# Altium PCB ignition.PcbDoc
Units mil, origin at the board's own origin, x right, y up, seen from the top; angles counter-clockwise.
Board outline 2165.35 x 2362.2 mil, 2 copper layers (Top, Bottom); 26 components, 21 nets, 119 pads, 73 vias.
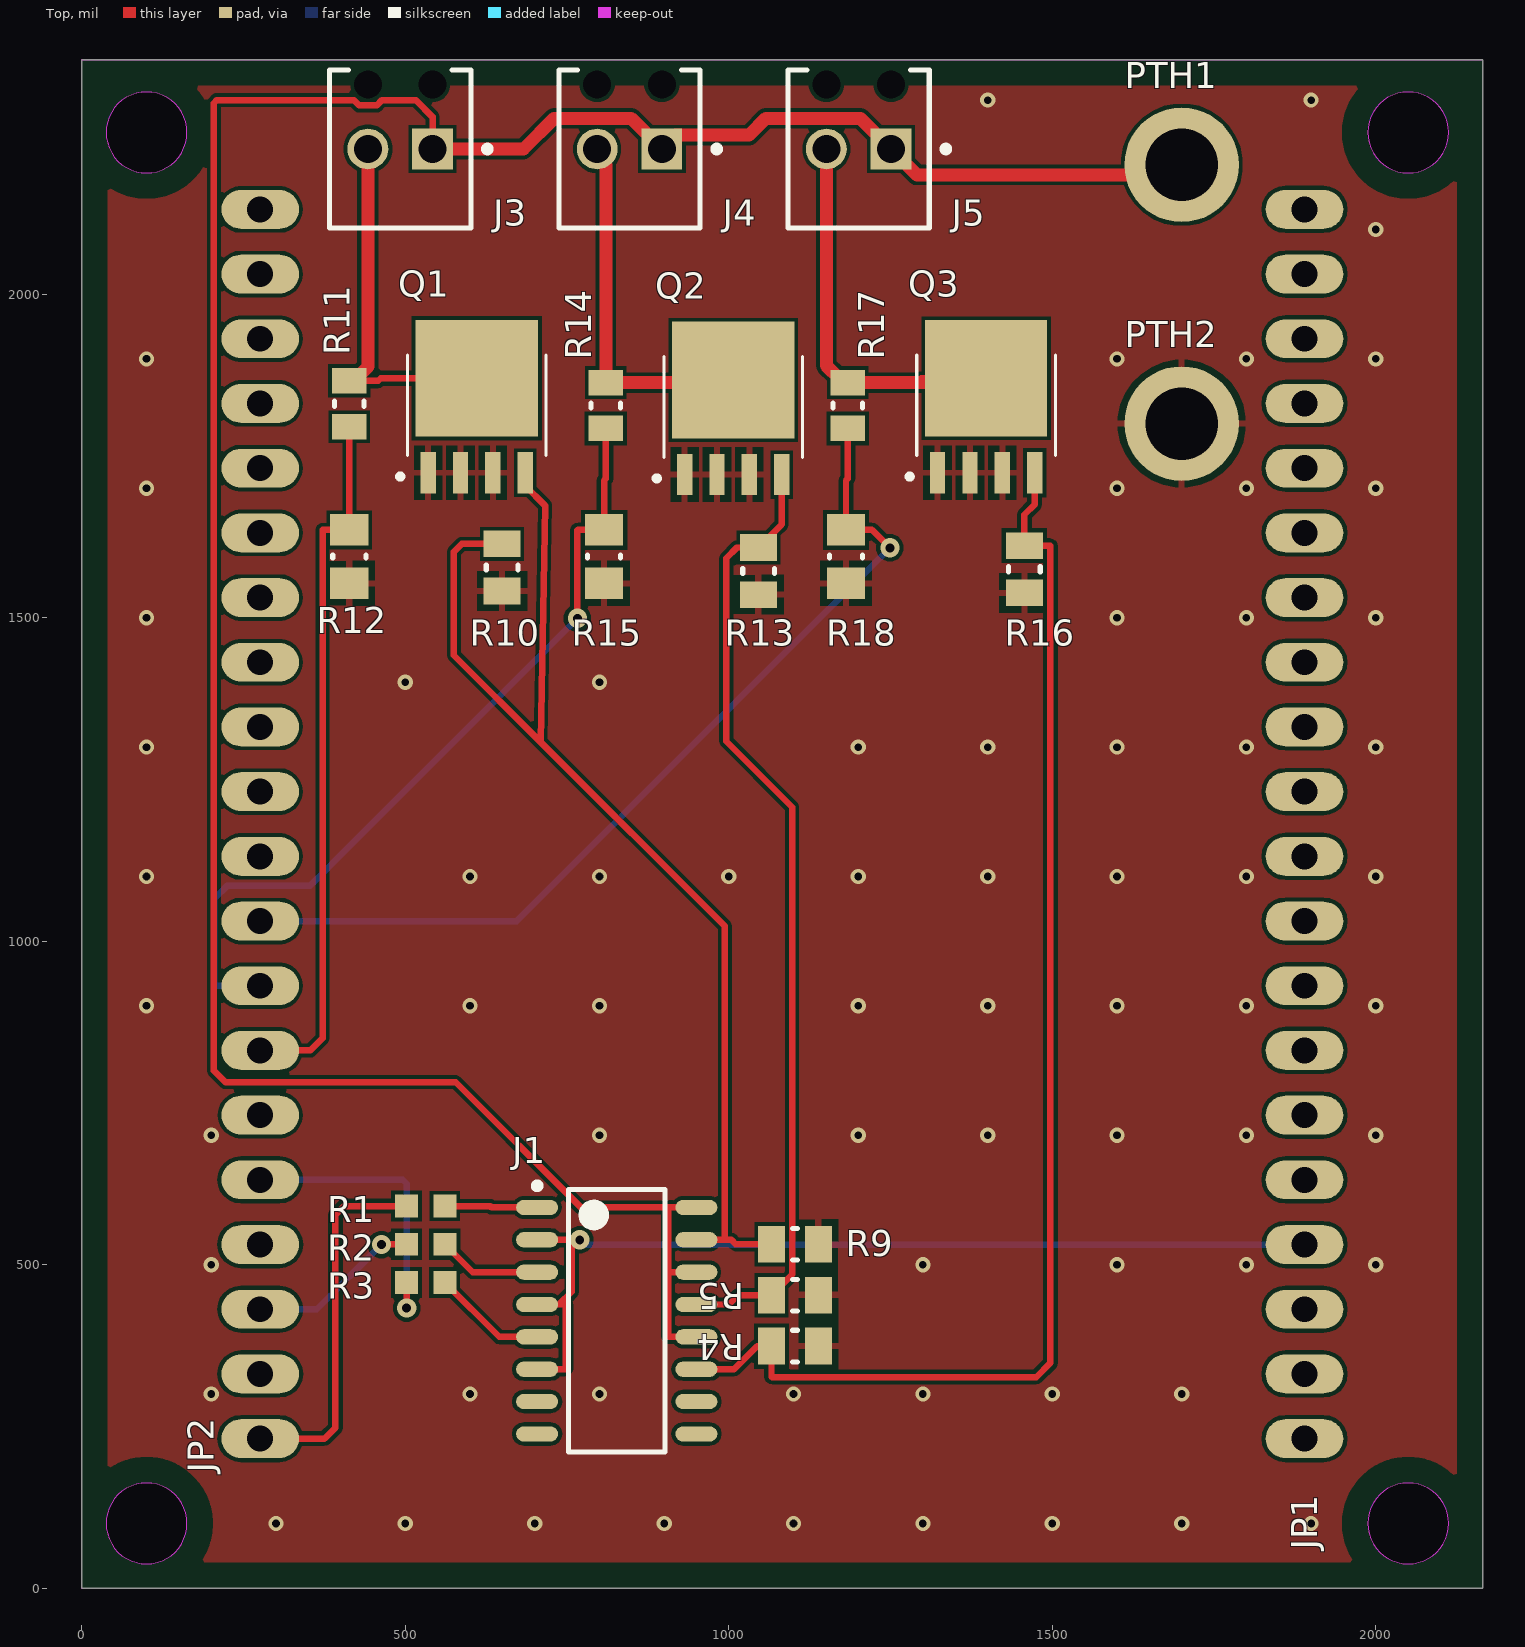
[diagram p0: Top view]
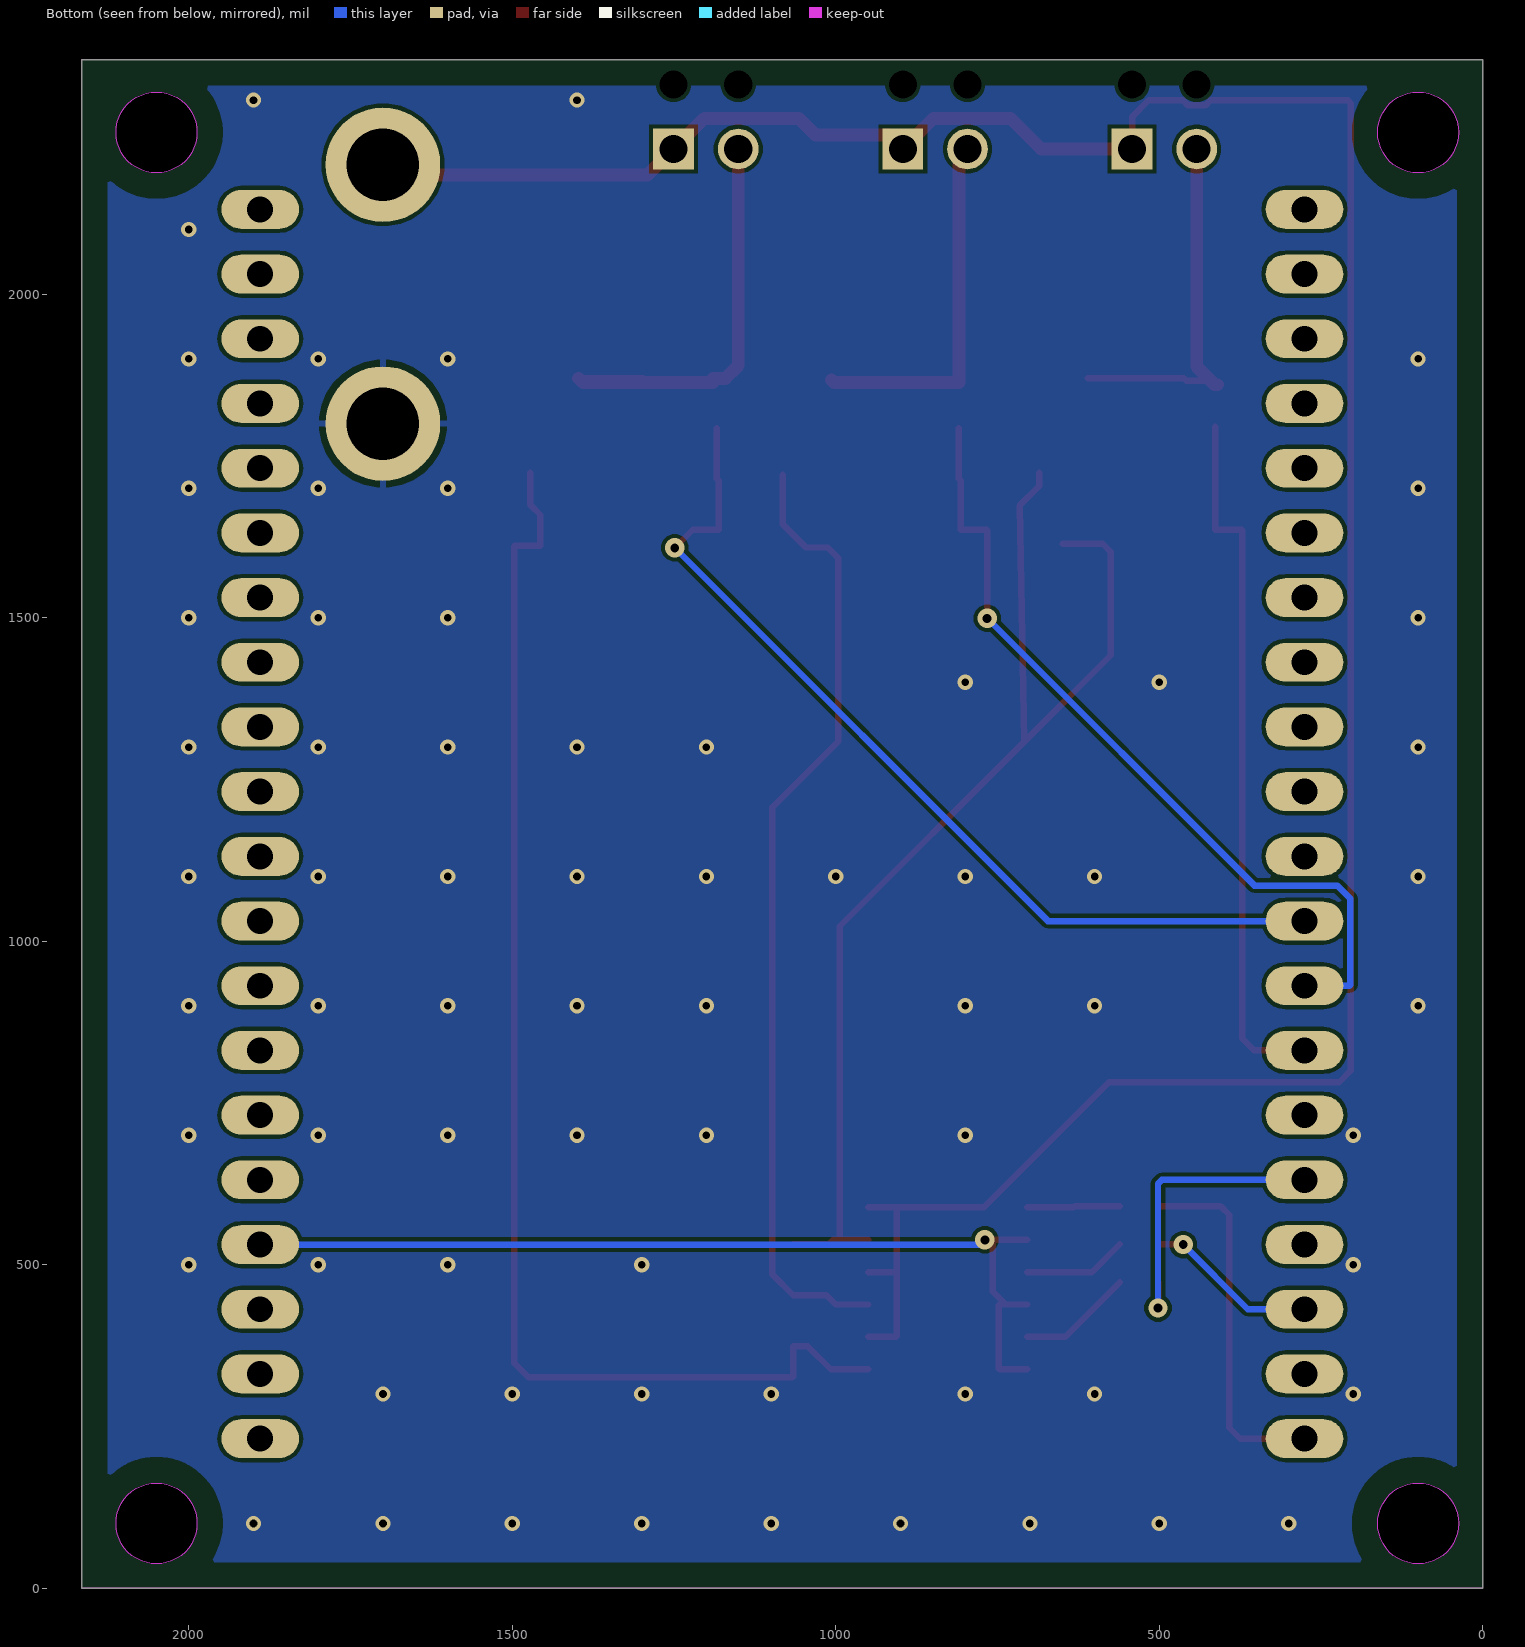
[diagram p1: Bottom view, seen from below]

## Layer stack, top to bottom
Top Solder: solder mask 0.4, Solder Resist, Dk 3.5
Top: signal copper 1.378
Dielectric 1: dielectric 12.6, FR-4, Dk 4.8
Bottom: signal copper 1.378
Bottom Solder: solder mask 0.4, Solder Resist, Dk 3.5

## Board outline
0,2362.2 0,0 2165.35,0 2165.35,2362.2
cut-out: 2050,2187.5 ccw(c2050,2250) 2112.5,2250 ccw(c2050,2250) 2050,2312.5 ccw(c2050,2250) 1987.5,2250 ccw(c2050,2250)
cut-out: 100,2187.5 ccw(c100,2250) 162.5,2250 ccw(c100,2250) 100,2312.5 ccw(c100,2250) 37.5,2250 ccw(c100,2250)
cut-out: 100,37.5 ccw(c100,100) 162.5,100 ccw(c100,100) 100,162.5 ccw(c100,100) 37.5,100 ccw(c100,100)
cut-out: 2050,37.5 ccw(c2050,100) 2112.5,100 ccw(c2050,100) 2050,162.5 ccw(c2050,100) 1987.5,100 ccw(c2050,100)

## Design rules (kind name [scope] priority, off if disabled: settings)
BoardOutlineClearance mdCopperDimension [All] p1: gap=10 ignorepadtopadclearanceinfootprint=FALSE except(0: Arc-SplitContinuation Track-SplitContinuation SMDPad-SplitContinuation THPad-SplitContinuation Via-SplitContinuation Fill-SplitContinuation Poly-SplitContinuation Region-SplitContinuation Text-SplitContinuation; 40: Poly-OutlineEdge Poly-CavityEdge Poly-CutoutEdge Poly-SplitBarrior)
Clearance "Clearance (Same Net)" [All] p1: gap=6 ignorepadtopadclearanceinfootprint=FALSE
Clearance [All] p2: gap=6 ignorepadtopadclearanceinfootprint=FALSE
HoleSize [All] p1: absolutevalues=TRUE maxlimit=100000 minlimit=13.78 maxpercent=80.000 minpercent=20.000
HoleToHoleClearance mdDrill [All] p1: gap=6 allowstackedmicrovias=TRUE
MinimumSolderMaskSliver [All] p1 off: minsoldermaskwidth=10
PasteMaskExpansion mlMinCreamFrame [All] p1: expansion=0
PolygonConnect ThermalVias [IsVia] p1: connectstyle=Direct reliefconductorwidth=10 reliefentries=4 polygonreliefangle="90 Angle" airgapwidth=10
PolygonConnect [All] p2: connectstyle=Relief reliefconductorwidth=10 reliefentries=4 polygonreliefangle="90 Angle" airgapwidth=10
RoutingVias [All] p1: holewidth=13.78 width=29.78 viastyle="Through Hole" minholewidth=13.78 minwidth=29.78 maxholewidth=100 maxwidth=100
SolderMaskExpansion mlMinStopFrame [All] p1: expansion=4 istentingtop=FALSE
Width [All] p1: maxlimit=20 minlimit=5 preferedwidth=10 minimp=50.000000 maximp=50.000000 favimp=50.000000
26 further rules are at their usual default settings.

## Components (designator, comment, footprint, x,y, rotation, side; value= is the part's Value field where it differs from the comment)
J1 "IS2801-4" SOP127P680X220-16N 826.77,413.39 r0 top
J3 "1725656" PHOE-1725656-2 492.13,2224.41 r180 top
J4 "1725656" PHOE-1725656-2 846.46,2224.41 r180 top
J5 "1725656" PHOE-1725656-2 1200.79,2224.41 r180 top
JP1 "PINHD-1X20" 1X20 1889.76,1181.1 r90 top
JP2 "PINHD-1X20" 1X20 275.59,1181.1 r90 top
PTH1 "WIRE_CONNECTOR" "WIRE MOUNT" 1700,2200 r0 top
PTH2 "WIRE_CONNECTOR" "WIRE MOUNT" 1700,1800 r0 top
Q1 "Ingiter FET" PSMN5R6-60YLX 610.24,1828.35 r0 top
Q2 "Ingiter FET" PSMN5R6-60YLX 1006.69,1825.59 r0 top
Q3 "Ingiter FET" PSMN5R6-60YLX 1397.64,1828.35 r0 top
R1 "WR06X331JTL" WR06X331 531.5,590.55 r0 top
R2 "WR06X331JTL" WR06X331 531.5,531.5 r0 top
R3 "WR06X331JTL" WR06X331 531.5,472.44 r0 top
R4 "1K" RESC2013X50X30NL20T20 1102.36,374.02 r180 top
R5 "1K" RESC2013X50X30NL20T20 1102.36,452.76 r180 top
R9 "1K" RESC2013X50X30NL20T20 1102.36,531.5 r180 top
R10 "1K" RESC2013X50X30NL20T20 649.61,1577.76 r90 top
R11 "51K" RESC2013X60X35NL10T20 413.39,1830.71 r90 top value="51000 Ohm"
R12 "15K" RESC0805(2012)_M 413.39,1594.49 r90 top value="15000.00 Ohm"
R13 "1K" RESC2013X50X30NL20T20 1046.06,1572.05 r90 top
R14 "51K" RESC2013X60X35NL10T20 809.84,1827.95 r90 top
R15 "15K" RESC0805(2012)_M 807.09,1594.49 r90 top value="15000.00 Ohm"
R16 "1K" RESC2013X50X30NL20T20 1456.69,1574.8 r90 top
R17 "51K" RESC2013X60X35NL10T20 1183.86,1827.95 r90 top
R18 "15K" RESC0805(2012)_M 1181.1,1594.49 r90 top value="15000.00 Ohm"

## Footprints (in the part's own frame and the unit in brackets; to place one, negate y for a bottom-side part, rotate by r counter-clockwise, add the part's x,y. Pads: shape width x height; smd on the part's side, far side on the other; paste and mask are expansions set on the pad)
1X20 [mil] "1X20"
  oval 60x120 / inner round 0 / far side oval 60x120 hole 40: 1(-950,0) 2(-850,0) 3(-750,0) 4(-650,0) 5(-550,0) 6(-450,0) 7(-350,0) 8(-250,0) 9(-150,0) 10(-50,0) 11(50,0) 12(150,0) 13(250,0) 14(350,0) 15(450,0) 16(550,0) 17(650,0) 18(750,0) 19(850,0) 20(950,0)
  body extent -980,-60 980,60, height 150
PHOE-1725656-2 [mm] "Connector, 2-Leads, Body 6.2x5.4mm, Pitch 2.54mm"
  rect 1.6x1.6 hole 1.1: 1(-1.27,0)
  round 1.6 hole 1.1: 2(1.27,0)
  round 0 hole 1.1 unplated: MH1(-1.27,-2.54) MH2(1.27,-2.54)
  silkscreen extent -3.55,-3.1 2.77,3.1, body extent -2.77,-3.1 2.77,3.1, height 9
PSMN5R6-60YLX [mm]
  rect 0.6x1.62 smd: 1(-1.905,-2.65) 2(-0.635,-2.65) 3(0.635,-2.65) 4(1.905,-2.65)
  rect 4.8x4.58 smd paste-3: 5(0,1.06)
  silkscreen extent -3.1,-2.9 2.72,1.97
RESC0805(2012)_M [mm] "Chip Resistor, Body 2.0x1.3mm, IPC Low Density"
  rect 1.25x1.5 smd: 1(-1.05,0) 2(1.05,0)
  silkscreen extent -0.05,-0.65 0.05,0.65, body extent -1.1,-0.67 1.1,0.67, height 0.7
RESC2013X50X30NL20T20 [mm] "Chip Resistor, 2-Leads, Body 2.00x1.25mm, IPC Medium Density"
  rect 1.05x1.45 smd: 1(-0.925,0) 2(0.925,0)
  silkscreen extent -0.1,-0.63 0.1,0.62, body extent -1.1,-0.72 1.1,0.72, height 0.5
RESC2013X60X35NL10T20 [mm] "Chip Resistor, 2-Leads, Body 2.00x1.25mm, IPC Medium Density"
  rect 1x1.35 smd: 1(-0.9,0) 2(0.9,0)
  silkscreen extent -0.1,-0.58 0.1,0.58, body extent -1.05,-0.67 1.05,0.67, height 0.6
SOP127P680X220-16N [mm] "SOP, 16-Leads, Body 10.28x4.40mm, Pitch 1.27mm, IPC Medium Density"
  oval 1.65x0.6 smd: 1(-3.125,4.445) 2(-3.125,3.175) 3(-3.125,1.905) 4(-3.125,0.635) 5(-3.125,-0.635) 6(-3.125,-1.905) 7(-3.125,-3.175) 8(-3.125,-4.445) 9(3.125,-4.445) 10(3.125,-3.175) 11(3.125,-1.905) 12(3.125,-0.635) 13(3.125,0.635) 14(3.125,1.905) 15(3.125,3.175) 16(3.125,4.445)
  silkscreen extent -3.25,-5.15 1.9,5.42, body extent -2.3,-5.15 2.3,5.15, height 2.2
"WIRE MOUNT" [mm]
  round 4.5 hole 2.847: 1(0,0)
WR06X331 [mm] "330 Ohms ±5% 0.1W, 1/10W Chip Resistor 0603 (1608 Metric) Thick Film"
  rect 0.9x0.9 smd: 1(-0.75,0) 2(0.75,0)
  body extent -0.85,-0.45 0.85,0.45, height 0.6

## Part data
J1: "Optocoupler DC-IN 4-CH Transistor DC-OUT 16-Pin T/R", Case/Package=SOIC, Collector Emitter Voltage (VCEO)=400mV, Forward Voltage=1.2V, Manufacturer=Isocom, Max Operating Temperature=110°C, Max Output Voltage=80V, Min Operating Temperature=-55°C, Output Current per Channel=50mA, Supplier Part Number 1=IS2801-4CT-ND, Category=Optocouplers, ComponentLink1Description=https://datasheet.ciiva.com/16495/is2801-4smt-r-16495642.pdf?src-supplier=Future+Electronics, ComponentLink1URL=https://datasheet.ciiva.com/16495/is2801-4smt-r-16495642.pdf?src-supplier=Future+Electronics, ComponentLink2Description=https://datasheet.ciiva.com/29301/156969-da-01-en-optokoppler-is-2801-4-29301144.pdf?src-supplier=Conrad, ComponentLink2URL=https://datasheet.ciiva.com/29301/156969-da-01-en-optokoppler-is-2801-4-29301144.pdf?src-supplier=Conrad, Lead Free="Lead Free", Manufacturer Part Number=IS2801-4, Mount="Surface Mount", Number of Channels=4, Number of Pins=16, Packaging="Tape and Reel", Pricing 1="1=1.63000, 10=1.03000, 100=0.76220, 500=0.70040, 1000=0.57680 (USD)", RoHS=Yes, RoHS Compliant=Yes, Stock 1=23249, Supplier 1=Digi-Key
J3 J4 J5: library part CMP-2000-05299-1, "Male Header, Pitch 2.54 mm, 1 x 2 Position, Height 9 mm, Tail Length 3.5 mm", Colour=Green, Manufacturer="Phoenix Contact", Content=250pc(s), Datasheet URL=http://datasheet.octopart.com/1725656-Phoenix-Contact-datasheet-5302866.pdf, Datasheet Version=Apr-08, Industrial packaging=Yes, Manufacturer part No.=1725656, Manufacturer URL=http://www.phoenixcontact.com/, Number of contacts=2, Pitch=2.54mm, Type=MPT0,5/2-2,54
JP1 JP2: "PIN HEADER", DeviceSetName=PINHD-1X20, GateName_1=A, LibraryName=adafruit, SymbolName_1=PINHD20
Q1 Q2 Q3: library part PSMN5R6-60YLX, "PSMN5R6-60YL - N-channel 60 V, 5.6 mO logic level MOSFET in LFPAK56", Manufacturer=Nexperia, Supplier Part Number 1=771-PSMN5R6-60YLX, Category=MOSFETs, Manufacturer Part Number=PSMN5R6-60YLX, Pricing 1="1=1.17000, 10=1.05000, 50=1.05000, 100=0.82100, 1000=0.54200, 10000=0.45300 (USD)", RoHS=Yes, RoHS Compliant=Yes, Stock 1=26943, Supplier 1=Mouser
R1 R2 R3: "Res Thick Film 0603 330 Ohm 5% 0.1W(1/10W) ±100ppm/C SMD T/R", Case/Package=0603, Manufacturer="Walsin Technologies", Max Operating Temperature=155°C, Min Operating Temperature=-55°C, Power Rating=100mW, Resistance=330R, Supplier Part Number 1=1292-WR06X331JTLCT-ND, Temperature Coefficient=100ppm/°C, Tolerance=5%, Voltage Rating (DC)=75V, Category=Uncategorized, ComponentLink1Description=http://www.farnell.com/datasheets/1960319.pdf?src-supplier=Farnell, ComponentLink1URL=http://www.farnell.com/datasheets/1960319.pdf?src-supplier=Farnell, Contact Material=Tin, Lead Free="Lead Free", Manufacturer Part Number=WR06X331JTL, Number of Terminations=2, Packaging="Tape and Reel", Pricing 1="1=0.10000, 10=0.01000, 100=0.00330, 1000=0.00147, 2500=0.00128 (USD)", RoHS=Yes, RoHS Compliant=Yes, Stock 1=116752, Supplier 1=Digi-Key, Working Voltage=75V
R4 R5 R9 R10 R13 R16: library part CMP-1013-00510-2, Manufacturer="Vishay Dale", Part Number=CRCW08051K00FKEA
R11 R14 R17: library part CMP-2001-01389-1, Manufacturer=Yageo, Part Number=RC0805JR-0751KL
R12 R15 R18: library part CMP-1013-00102-1, "15K 0.125W 5% 0805 (2012 Metric)  SMD", Case-EIA=0805, Case-Metric=2012, Power="0.125 W", Tolerance="5 %", Technology=SMT

## Free pads (board coordinates)
  round 125 hole 125 unplated: MH1(100,100) MH2(2050,100) MH3(2050,2250) MH4(100,2250)

## Via types
v1: diameter 23.62, hole 11.81, Top to Bottom, tented both sides, 68 vias
v2: diameter 29.78, hole 13.78, Top to Bottom, 5 vias

## Nets (pads, with @x,y where several pads share a name; then routed paths per layer and width w, separated by ;. In a path a pad name is that pad's centre, name@x,y a point inside that pad or via, vN(x,y) a via of type N, cw(c..) or ccw(c..) an arc to the next point about the centre after c; other vN are vias at no path point)
12V: J1.12 J1.14 J1.16 J3.1 J4.1 J5.1 PTH1.1 | length 4269.1
  Top w10: J3.1 542.13,2274 516.13,2300 463.9,2300 455.65,2291.76 428.6,2291.76 420.36,2300 208.69,2300 204,2295.31 204,800 222,782 577.77,782 771.39,588.39 907,588.39 ; J1.12 907,388.39 906,389.39 906,487.39 907,488.39 ; J1.14 907,488.39 ; J1.16 907,588.39 ; 907,488.39 906,489.39 906,587.39 907,588.39
  Top w20: J3.1 682.54,2224.41 730.04,2271.91 848.96,2271.91 J4.1@890,2230.87 ; J4.1 917.95,2245.91 1031.21,2245.91 1057.21,2271.91 1203.29,2271.91 J5.1 1290.67,2184.53 1695.47,2184.53 PTH1.1@1700,2180
GND: PTH2.1 Q1.1 Q1.2 Q1.3 Q2.1 Q2.2 Q2.3 Q3.1 Q3.2 Q3.3 R4.1 R5.1 R9.1 R10.1 R12.1 R13.1 R15.1 R16.1 R18.1
  other v1: 300,100 500,100 700,100 900,100 1100,100 1300,100 1500,100 1700,100 1900,100 200,300 600,300 800,300 1100,300 1300,300 1500,300 1700,300 200,500 1300,500 1600,500 1800,500 2000,500 200,700 800,700 1200,700 1400,700 1600,700 1800,700 2000,700 100,900 600,900 800,900 1200,900 1400,900 1600,900 1800,900 2000,900 100,1100 600,1100 800,1100 1000,1100 1200,1100 1400,1100 1600,1100 1800,1100 2000,1100 100,1300 1200,1300 1400,1300 1600,1300 1800,1300 2000,1300 500,1400 800,1400 100,1500 1600,1500 1800,1500 2000,1500 100,1700 1600,1700 1800,1700 2000,1700 100,1900 1600,1900 1800,1900 2000,1900 2000,2100 1400,2300 1900,2300
IGN1: JP2.1 R1.1 | length 567.9
  Top w10: JP2.1 375,231.1 392,248.1 392,577 405.55,590.55 R1.1
IGN1_2: JP2.2
IGN2: JP2.3 R2.1 | length 268
  Top w10: v2(463,531) 463.5,531.5 R2.1
  Bottom w10: JP2.3 363.1,431.1 v2(463,531)
IGN2_2: JP2.4
IGN3: JP2.5 R3.1 | length 460.4
  Top w10: v2(502,433) R3.1
  Bottom w10: JP2.5 495.9,631.1 502,625 v2(502,433)
IGN3_2: JP2.6
IGN_CHK1: JP2.7 R11.1 R12.2 | length 1090.6
  Top w10: JP2.7 353.1,831.1 372,850 372,1635.33 372.5,1635.83 R12.2 R11.1
IGN_CHK2: JP2.8 R14.1 R15.2 | length 1280.8
  Top w10: v2(766,1499) 766,1634.83 767,1635.83 R15.2 807.09,1712 809.84,1714.76 R14.1
  Bottom w10: JP2.8 206,931.1 204.5,932.6 204.5,1065.5 225,1086 353,1086 v2(766,1499)
IGN_CHK3: JP2.9 R17.1 R18.2 | length 1449.6
  Top w10: R17.1 1183.86,1714.76 1181.1,1712 R18.2 1221.17,1635.83 v2(1249,1608)
  Bottom w10: JP2.9 672.1,1031.1 v2(1249,1608)
Iso_IGN1: J1.15 Q1.4 R9.2 R10.2 | length 1864.9
  Top w10: R10.2 587.5,1614.17 575,1601.67 575,1442 709,1308 ; Q1.4 685.24,1704 716,1673.24 709,1308 ; J1.15 993,538.39 ; R9.2 1010.89,531.5 1004,538.39 993,538.39 ; 709,1308 994,1023 994,539.39 993,538.39
Iso_IGN2: J1.13 Q2.4 R5.2 R13.2 | length 1501.3
  Top w10: J1.13 1000,438.39 1014.37,452.76 R5.2 1098,484.81 1098,1207 996,1309 996,1591.96 1012.5,1608.46 R13.2 1081.69,1644.09 Q2.4
Iso_IGN3: J1.11 Q3.4 R4.2 R16.2 | length 2041.1
  Top w10: J1.11 1008,338.39 1043.63,374.02 R4.2 1065.94,327 1066.94,326 1475,326 1497,348 1497,1610.72 1496.5,1611.22 R16.2 1456.69,1659 1472.64,1674.95 Q3.4
MCU_GND: J1.2 J1.4 J1.6 JP1.4 | length 1485
  Top w10: J1.6 747,338.39 748,339.39 748,437.39 747,438.39 737.5,438.39 ; J1.4 737.5,438.39 ; J1.2 v2@756,538.39 ; v2(769.61,538.39) v2@756,538.39 ; 737.5,438.39 757.11,458 757.11,537.28 v2@756,538.39
  Bottom w10: v2(769.61,538.39) 776.9,531.1 JP1.4
NetJ1_1: J1.1 R1.2 | length 143.6
  Top w10: R1.2 631,590.55 633.17,588.39 J1.1
NetJ1_3: J1.3 R2.2 | length 160.6
  Top w10: R2.2 604.13,488.39 J1.3
NetJ1_5: J1.5 R3.2 | length 177.5
  Top w10: R3.2 645.08,388.39 J1.5
NetJ3_2: J3.2 Q1.5 R11.2 | length 571.7
  Top w10: R11.2@420.28,1866.14 458,1866.14 461.94,1870.08 Q1.5
  Top w20: R11.2@410,1860 414.13,1860 420.28,1866.14 442.13,1887.99 J3.2
NetJ4_2: J4.2 Q2.5 R14.2 | length 563.3
  Top w20: J4.2@790,2220 790,2219.23 809.84,2199.39 R14.2 1002.76,1863.39 Q2.5
NetJ5_2: J5.2 Q3.5 R17.2 | length 692.5
  Top w10: 1297.69,1870.08 Q3.5
  Top w20: J5.2 1150.79,1889.57 1170.35,1870 R17.2@1190,1870 ; R17.2@1190,1863.39 1390.95,1863.39 Q3.5
pads on no net: J1.7 J1.8 J1.9 J1.10 J3.MH1 J3.MH2 J4.MH1 J4.MH2 J5.MH1 J5.MH2 JP1.1 JP1.2 JP1.3 JP1.5 JP1.6 JP1.7 JP1.8 JP1.9 JP1.10 JP1.11 JP1.12 JP1.13 JP1.14 JP1.15 JP1.16 JP1.17 JP1.18 JP1.19 JP1.20 JP2.10 JP2.11 JP2.12 JP2.13 JP2.14 JP2.15 JP2.16 JP2.17 JP2.18 JP2.19 JP2.20

## Polygon pours and split planes (outlines as drawn)
GND on Bottom "GND_L02_P002" (solid, pour order 2): 20,40 20,2340 2140,2340 2140,40
GND on Top "GND_L01_P004" (solid, pour order 4): 40,40 2140,40 2140,2340 20,2340

## Keep-outs
Keep-Out Layer:
  the board outline again, w0

## Silkscreen, mask and mechanical layers (free items; w line width, h text height)
Dimension:
  the board outline again, w0